# EAGLE board VF_FabricaDeUnicorniosMuertos_BlankPANEL (EAGLE 9.6.2)
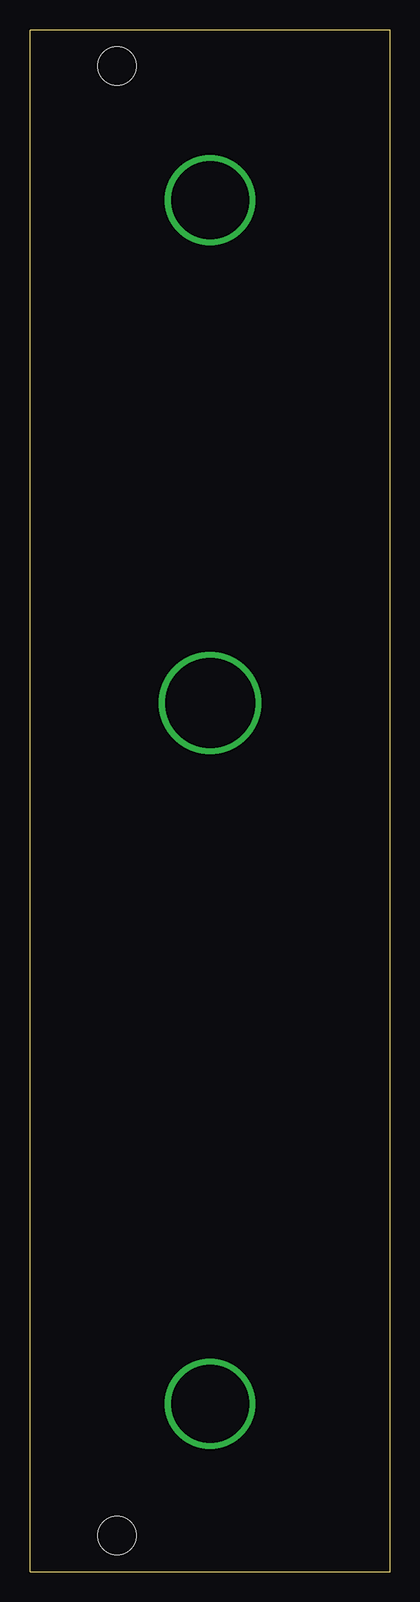
[diagram p0: board, top side]

Size 30 x 128.5 mm. Coordinates in mm from the lower left corner, seen from the top.
Copper layers (1*16): Top 0.035mm / dielectric 1.5mm / Bottom 0.035mm
Design rules "default": minimum track width 6mil, minimum drill 0.35mm, track to track 6mil, track to pad 6mil, pad to pad 6mil, via to via 6mil, smd to smd 6mil, copper to edge 40mil, drill to drill 6mil, minimum pad ring 10mil, minimum via ring 8mil, stop-mask expansion 4mil, vias tented up to drill 0mil, thermal gap 10mil
Net classes: 1 power: width 0.61 mm

## Footprints (pad centres in the part's own frame; a part is rotated, then mirrored left to right if it is on the bottom)
EURO_PANEL_6HP = hole 3.2: 7.5,125.5; 7.5,3

## Placement (x,y rotation side)
U$2  [EURO_PANEL_6HP]  -0.24,0 0 top

## Library data of the parts
U$2 = eurohelper

## Tracks (layer width: path | path; a pad name or v marks a point on that pad's centre or on a via)
N$8  (via drill 6.5)
  other vias: 15,114.3
N$9  (via drill 6.5)
  other vias: 15,13.97
N$10  (via drill 7.5)
  other vias: 15,72.39